# Altium PCB PCB.PcbDoc
Units mil, origin at the board's own origin, x right, y up, seen from the top; angles counter-clockwise.
Board outline 1633.86 x 1633.86 mil, 2 copper layers (Top Layer, Bottom Layer); 8 components, 14 nets, 42 pads, 4 vias.
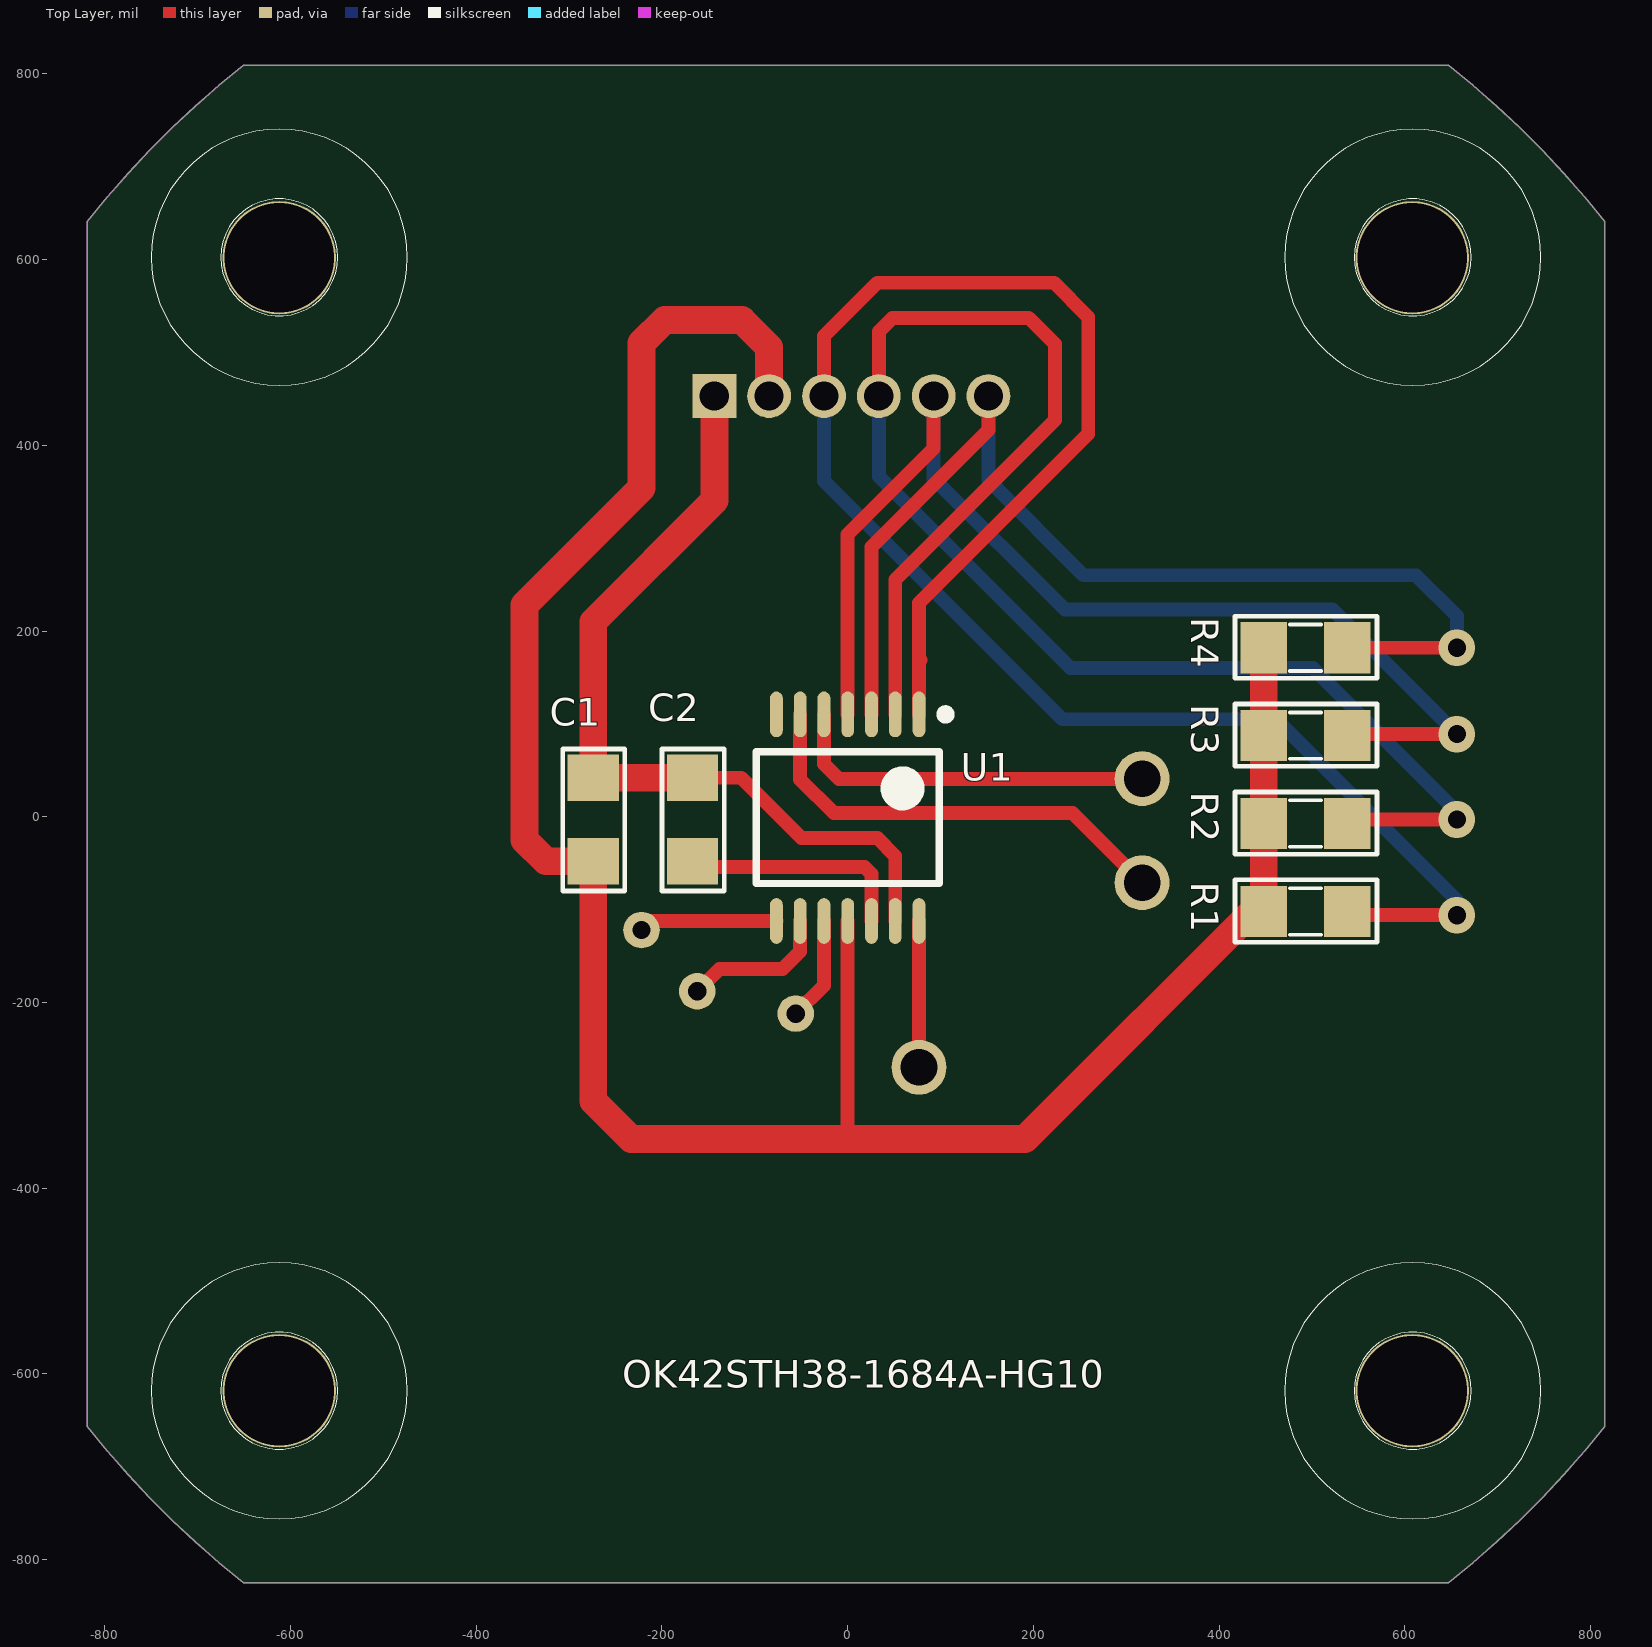
[diagram p0: Top Layer view]
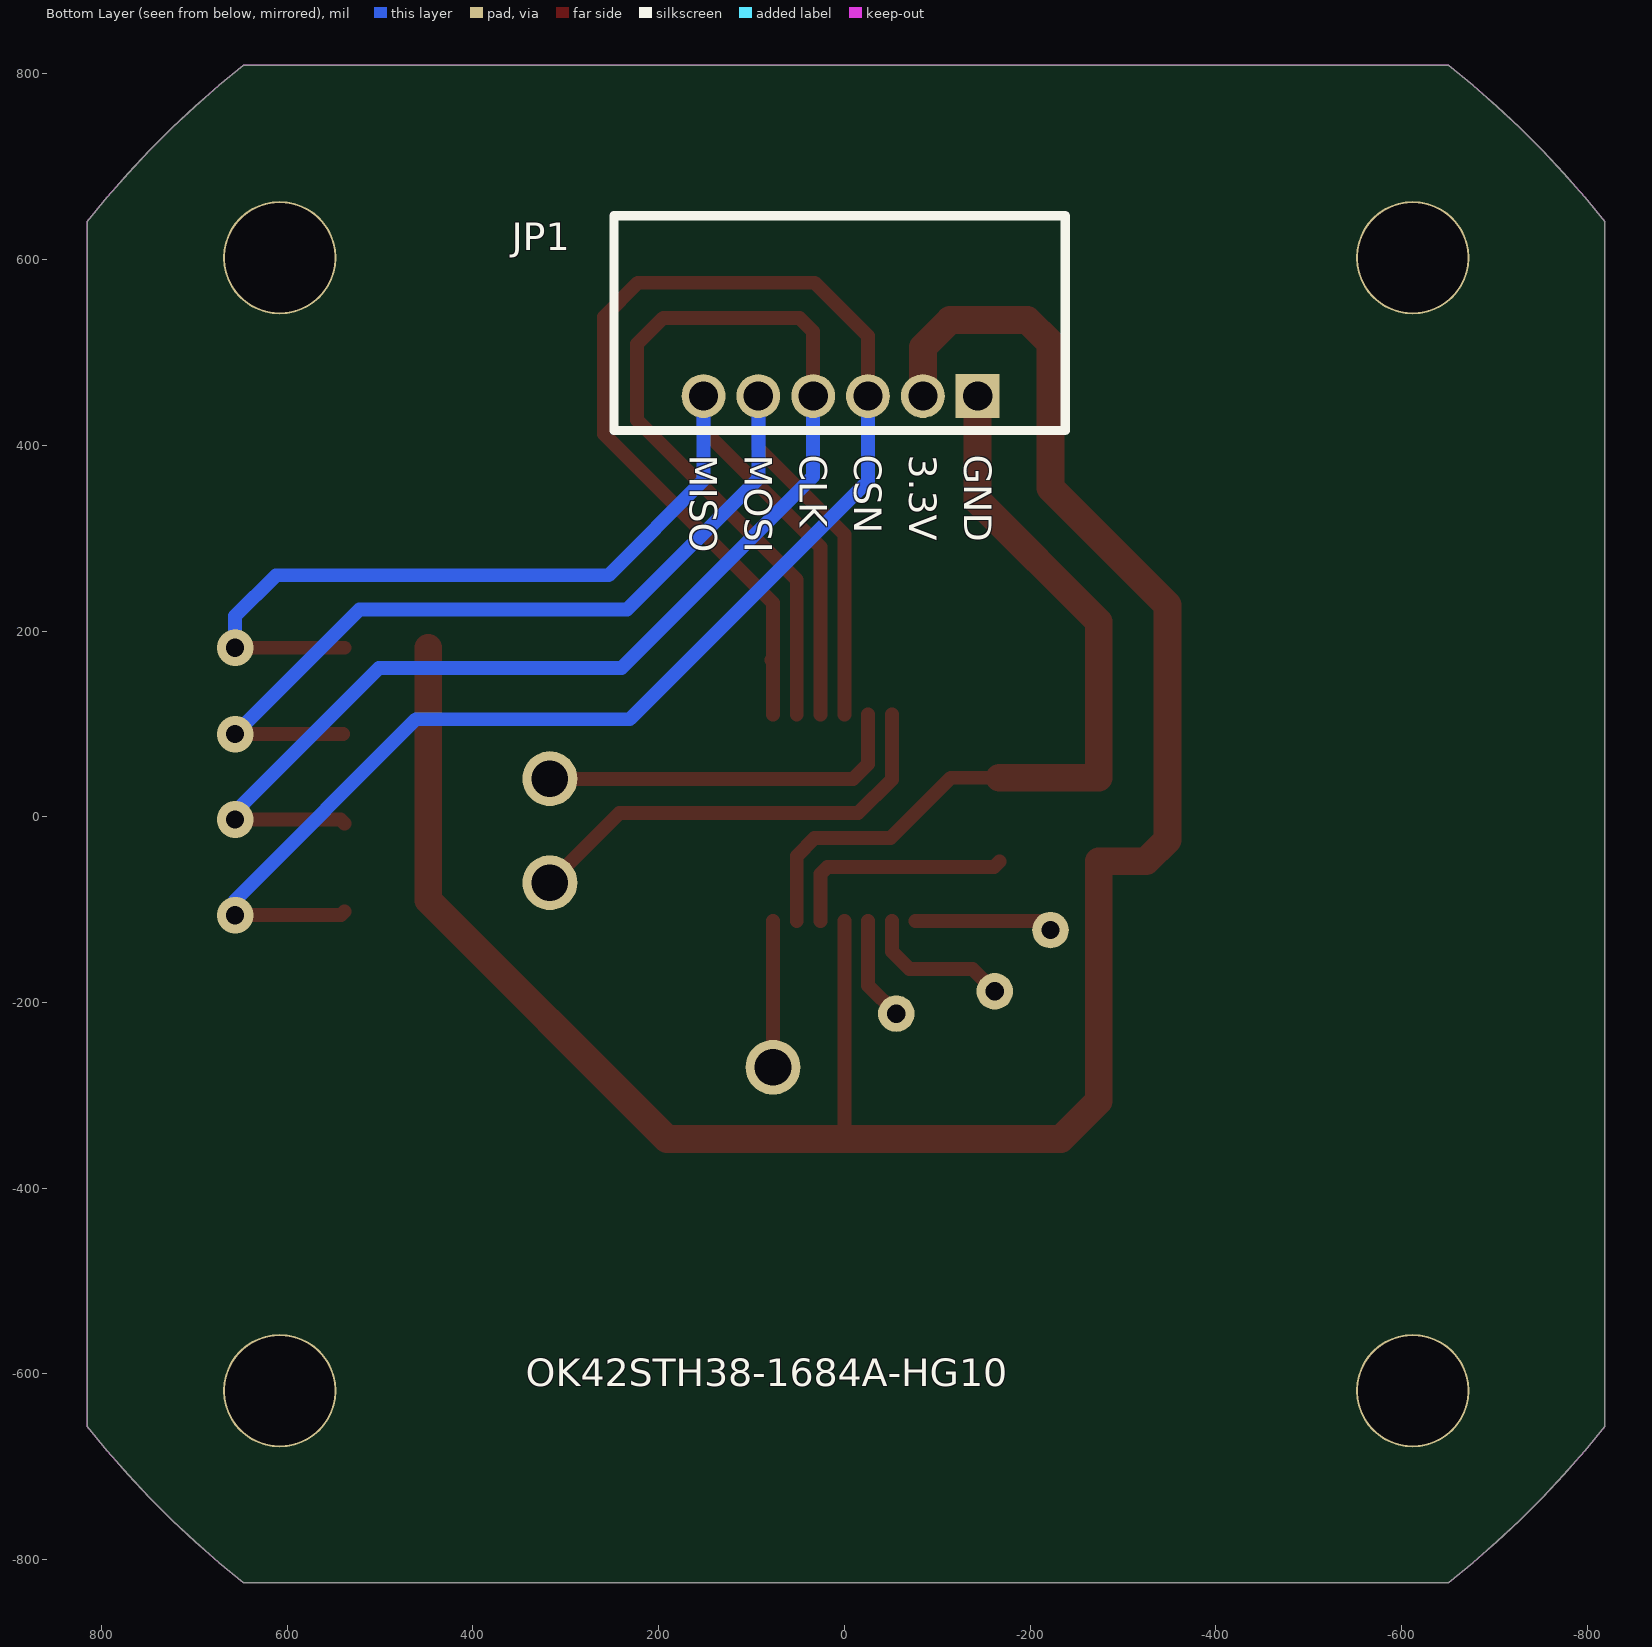
[diagram p1: Bottom Layer view, seen from below]
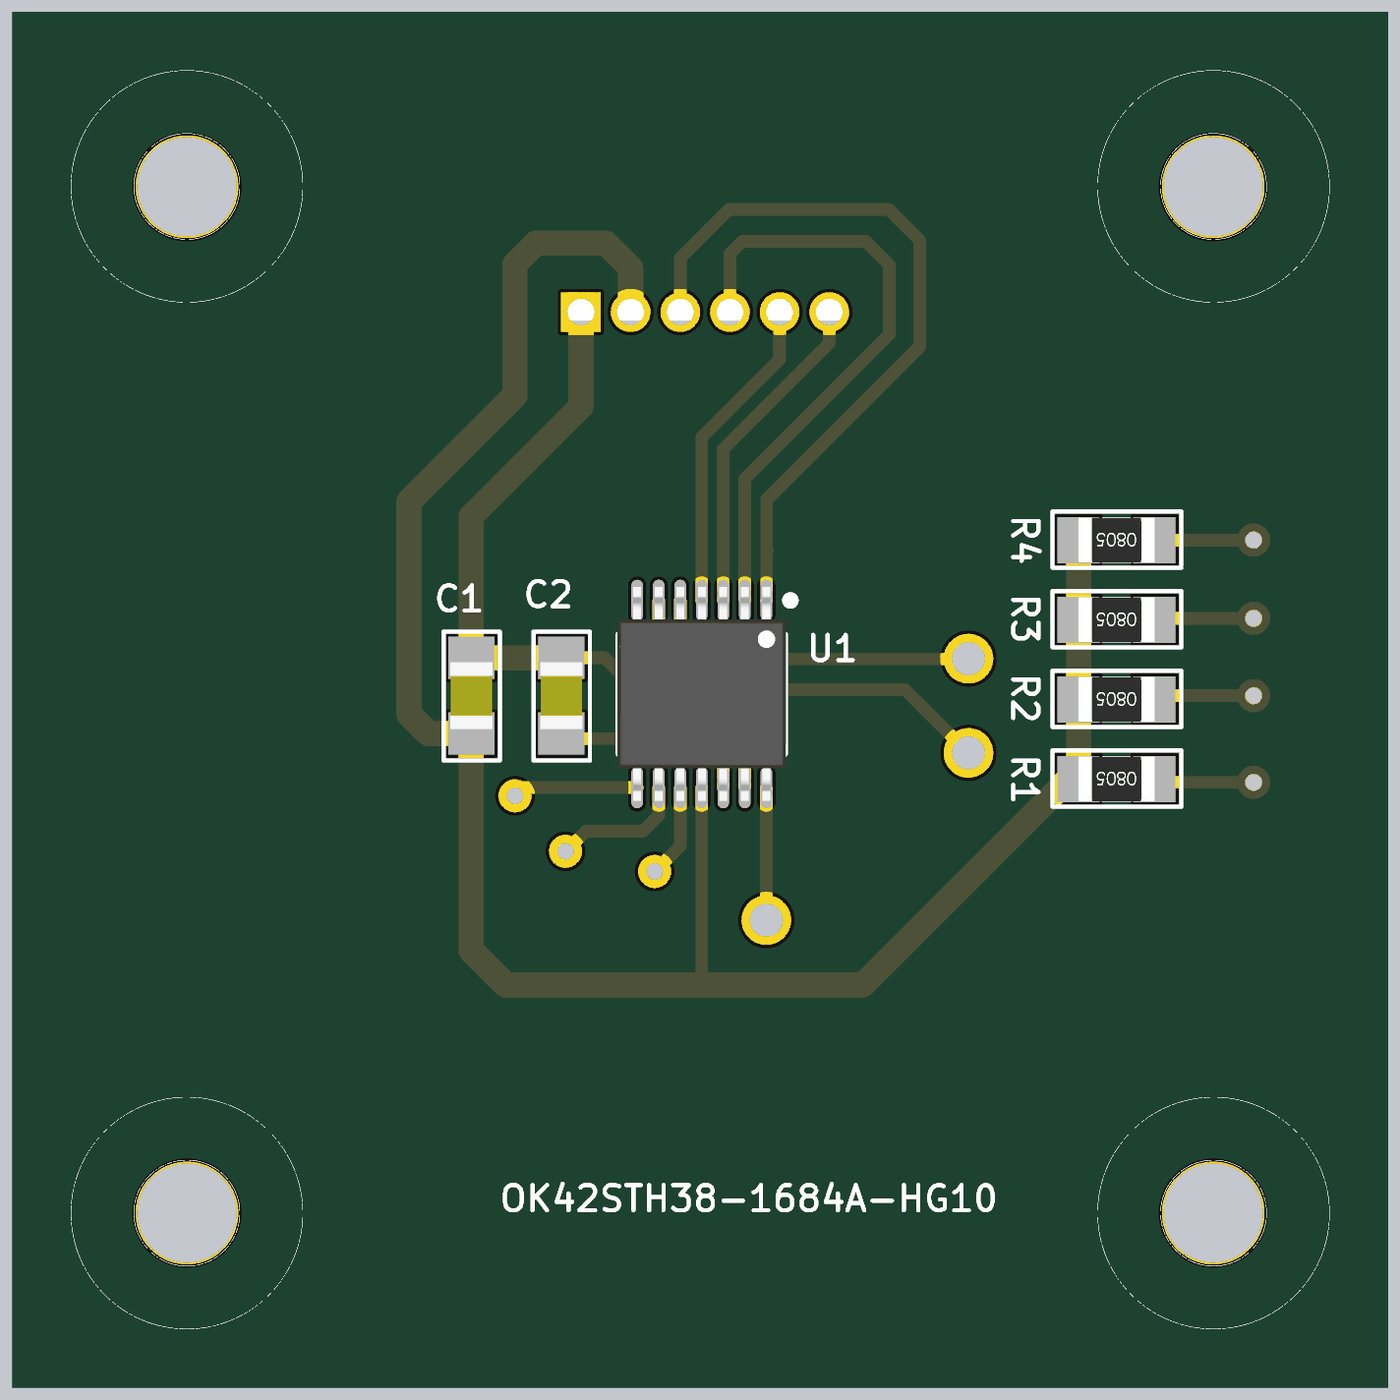
[diagram p2: 3D render of the assembled board from above, using the file's embedded part models]

## Layer stack, top to bottom
Top Solder: solder mask 0.4, Solder Resist, Dk 3.5
Top Layer: signal copper 1.4
Dielectric 1: dielectric 12.6, FR-4, Dk 4.8
Bottom Layer: signal copper 1.4
Bottom Solder: solder mask 0.4, Solder Resist, Dk 3.5

## Board outline
-818.75,-656.75 ccw(c-1.82,-7.82) -650.75,-824.75 -650.76,-824.75 647.11,-824.75 ccw(c-1.82,-7.82) 815.11,-656.75 815.11,-656.76 815.11,641.11 ccw(c-1.82,-7.82) 647.11,809.11 -650.76,809.11 -650.75,809.11 ccw(c-1.82,-7.82) -818.75,641.11

## Design rules (kind name [scope] priority, off if disabled: settings)
Clearance [All] p1: gap=10
MinimumSolderMaskSliver [All] p1: minsoldermaskwidth=0
PolygonConnect [All] p1: connectstyle=Direct reliefconductorwidth=10 reliefentries=4 polygonreliefangle="90 Angle" airgapwidth=10
RoutingVias [All] p1: holewidth=39.37 width=78.74 viastyle="Through Hole" minholewidth=15.75 minwidth=39.37 maxholewidth=78.74 maxwidth=196.85
SilkToBoardRegionClearance [All] p1 off:
SilkToSolderMaskClearance [IsPad] p1: minsilkscreentomaskgap=0 clearancetoexposedcopper=TRUE
SolderMaskExpansion [All] p1: expansion=4
Width [All] p1: maxlimit=100 minlimit=10 preferedwidth=20
27 further rules are at their usual default settings.

## Components (designator, comment, footprint, x,y, rotation, side; value= is the part's Value field where it differs from the comment)
C1 "104" TU_SMD_0805 -274,-3 r90 top
C2 "104" TU_SMD_0805 -167,-3 r90 top
JP1 "Jump 6" "ZH 1.5 6P" 4,453 r0 bottom locked
R1 "4.7k" "Tro SMD 0805" 493,-102 r180 top
R2 "4.7k" "Tro SMD 0805" 493,-7.33 r180 top
R3 "4.7k" "Tro SMD 0805" 493,87.33 r180 top
R4 "4.7k" "Tro SMD 0805" 493,182 r180 top
U1 "AS5047D" TSSOP14 0,-1 r270 top locked

## Footprints (in the part's own frame and the unit in brackets; to place one, negate y for a bottom-side part, rotate by r counter-clockwise, add the part's x,y. Pads: shape width x height; smd on the part's side, far side on the other; paste and mask are expansions set on the pad)
"Tro SMD 0805" [mil]
  rect 50x55 smd: 1(-45,0) 2(45,0)
  silkscreen extent -77,-34 76,33, body extent -45,-27 45,27, height 28
TSSOP14 [mm] "TSSOP, 14-Leads, Body 5.00x4.40mm, Pitch 0.65mm, IPC High Density"
  oval 1.25x0.35 smd: 1(-2.825,1.95) 2(-2.825,1.3) 3(-2.825,0.65) 4(-2.825,0) 5(-2.825,-0.65) 6(-2.825,-1.3) 7(-2.825,-1.95) 8(2.825,-1.95) 9(2.825,-1.3) 10(2.825,-0.65) 11(2.825,0) 12(2.825,0.65) 13(2.825,1.3) 14(2.825,1.95)
  silkscreen extent -2.95,-2.5 1.8,2.8, body extent -3.23,-2.55 3.23,2.55, height 1.25
TU_SMD_0805 [mil]
  rect 50x55 smd: 1(-45,0) 2(45,0)
  silkscreen extent -77,-34 76,33, body extent -40,-25 40,25, height 24
"ZH 1.5 6P" [mm]
  rect 1.2x1.2 hole 0.8: 1(-3.749,0)
  round 1.2 hole 0.8: 2(-2.25,0) 3(-0.749,0) 4(0.749,0) 5(2.25,0) 6(3.749,0)
  silkscreen extent -6.15,-4.93 6.2,0.94, body extent -5.96,-4.75 6.04,0.25, height 3.71

## Part data
C1 C2: library part "Capacitor 0805", "Ceramic Chip Capacitor - Standard"
JP1: "Jump 6P 2.54"
R1 R2 R3 R4: library part "R nho", "RES, 100, 1%, 0.1 W, 0402"

## Free pads (board coordinates)
  round 122.05 hole 118.11: 0(-612,-618) 0(-612,602) 0(608,-618) 0(608,602)
  round 59.06 hole 39.37: 0(317,41) 1(317,-71) 3(76.77,-269.77)
  round 39.37 hole 19.68: 4(-222,-122) 4(-162,-188) 4(-56,-212)

## Via types
v1: diameter 39.37, hole 19.68, Top Layer to Bottom Layer, tented both sides, 4 vias

## Nets (pads, with @x,y where several pads share a name; then routed paths per layer and width w, separated by ;. In a path a pad name is that pad's centre, name@x,y a point inside that pad or via, vN(x,y) a via of type N, cw(c..) or ccw(c..) an arc to the next point about the centre after c; other vN are vias at no path point)
A: pad.1 U1.6 | length 484.3
  Top Layer w15: U1.6 -51.18,40.18 -15,4 242,4 pad.1
B: U1.7
CLK: JP1.4 R2.1 U1.2 | length 1733.1
  Top Layer w15: JP1.4 33.5,522.5 48,537 195,537 223,509 223,427 51.18,255.18 U1.2 ; R2.1 542.33,-3 v1(656,-3)
  Bottom Layer w15: JP1.4 33.5,366.5 240,160 501,160 656,5 v1(656,-3)
CSN: JP1.3 R1.1 U1.1 | length 1988.8
  Top Layer w15: JP1.3 -25.5,517.5 32,575 222,575 259,538 259,412 77,230 77,170.22 ; U1.1 77,110.45 77,170.22 ; 78.22,169 77,170.22 ; R1.1 542,-106 v1(656,-106)
  Bottom Layer w15: JP1.3 -25.5,361.5 231,105 461,105 656,-90 v1(656,-106)
GND: C1.2 C2.2 JP1.1 U1.13 | length 895.1
  Top Layer w15: C2.2 -115,42 -50,-23 32,-23 51.18,-42.18 U1.13
  Top Layer w30: C2.2 C1.2 -274,210 -143.6,340.4 JP1.1
I: pad.3 U1.14 | length 157.6
  Top Layer w15: pad.3 U1.14
MISO: JP1.6 R4.1 U1.3 | length 1257.6
  Top Layer w15: U1.3 25.59,290.59 151.6,416.6 JP1.6 ; 593,182 R4.1 v1(656,182)
  Bottom Layer w15: JP1.6 151.6,362.4 254,260 612,260 656,216 v1(656,182)
MOSI: JP1.5 R3.1 U1.4 | length 1263.5
  Top Layer w15: U1.4 0,304 92.6,396.6 JP1.5 ; R3.1@539.67,89 v1(656,89)
  Bottom Layer w15: JP1.5 92.6,364.4 234,223 522,223 v1(656,89)
TEST: pad.0@317,41 U1.5 | length 403
  Top Layer w15: U1.5 -25.59,56.59 -9.59,40.59 316.59,40.59 pad.0@317,41
U: pad.4@-56,-212 U1.10 | length 112.4
  Top Layer w15: pad.4@-56,-212 -25.59,-181.59 U1.10
V: pad.4@-162,-188 U1.9 | length 161.5
  Top Layer w15: pad.4@-162,-188 -138,-164 -70,-164 -51.18,-145.18 U1.9
VDD: C1.1 JP1.2 R1.2 R2.2 R3.2 R4.2 U1.11 | length 2493.5
  Top Layer w15: 0,-347 U1.11
  Top Layer w30: JP1.2 -84.6,505.6 -114,535 -197,535 -222,510 -222,354 -348,228 -348,-25 -325,-48 C1.1 -274,-306 -233,-347 0,-347 191,-347 448,-90 R2.2 R3.2 R4.2
VDD3V: C2.1 U1.12 | length 248.8
  Top Layer w15: C2.1 -161,-54 18,-54 25.59,-61.59 U1.12
W: pad.4@-222,-122 U1.8 | length 149.3
  Top Layer w15: pad.4@-222,-122 -212.22,-112.22 U1.8

## Keep-outs
Keep-Out Layer:
  the board outline again, w0.5

## Silkscreen, mask and mechanical layers (free items; w line width, h text height)
Top Overlay:
  circle w0.5: c-612.06,-618.06 r137.8
  circle w0.5: c-612.06,-618.06 r62.99
  circle w0.5: c608.42,-618.06 r137.8
  circle w0.5: c608.42,-618.06 r62.99
  circle w0.5: c608.42,602.42 r137.8
  circle w0.5: c608.42,602.42 r62.99
  circle w0.5: c-612.06,602.42 r137.8
  circle w0.5: c-612.06,602.42 r62.99
  text "OK42STH38-1684A-HG10" at -243,-615 h30
Bottom Overlay:
  text "GND" at -129,390 h30 r90
  text "3.3V" at -70,390 h30 r90
  text "CSN" at -10.9,390 h30 r90
  text "CLK" at 48.1,390 h30 r90
  text "MOSI" at 107.2,390 h30 r90
  text "MISO" at 166.2,390 h30 r90
  text "OK42STH38-1684A-HG10" at 343,-613 h30